# Altium PCB GRHV_Double_30v.PcbDoc
Units mil, origin at the board's own origin, x right, y up, seen from the top; angles counter-clockwise.
Board outline 6000 x 4000 mil, 2 copper layers (Top Layer, Bottom Layer); 83 components, 43 nets, 208 pads, 0 vias.
Unrouted connection lines stored in the file: 119.
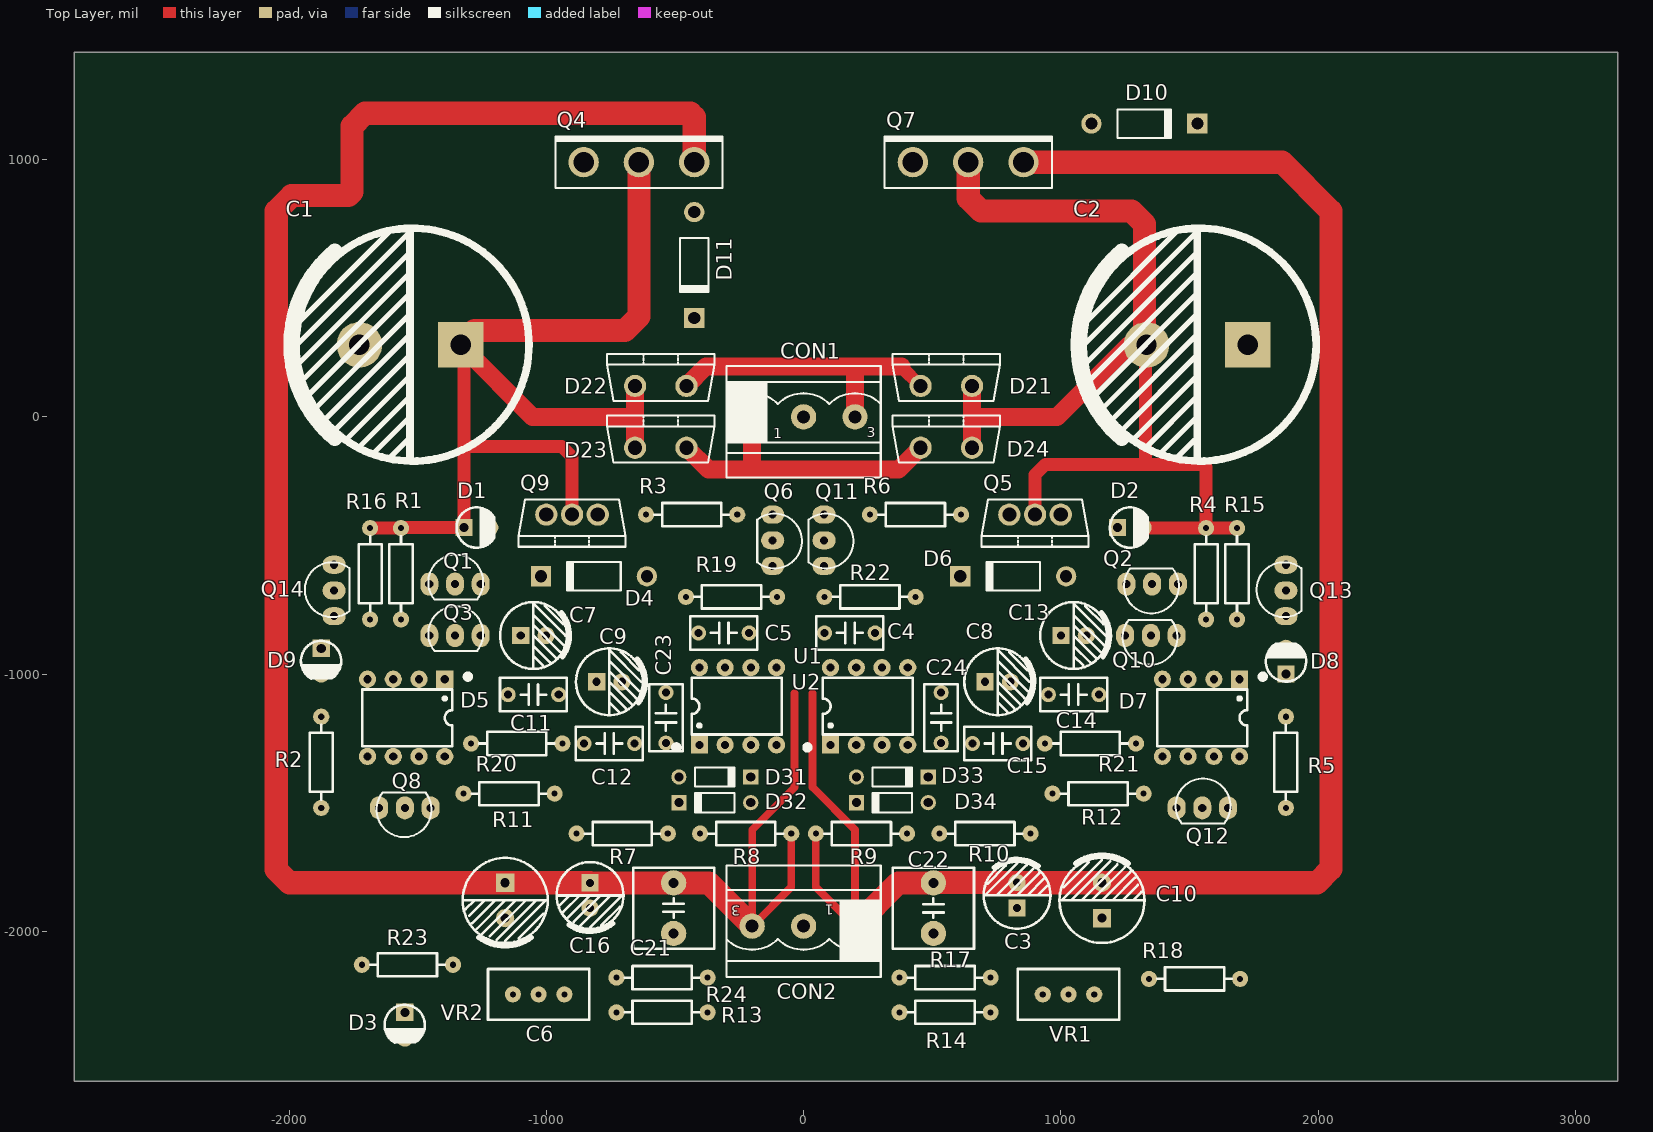
[diagram p0: Top Layer view]
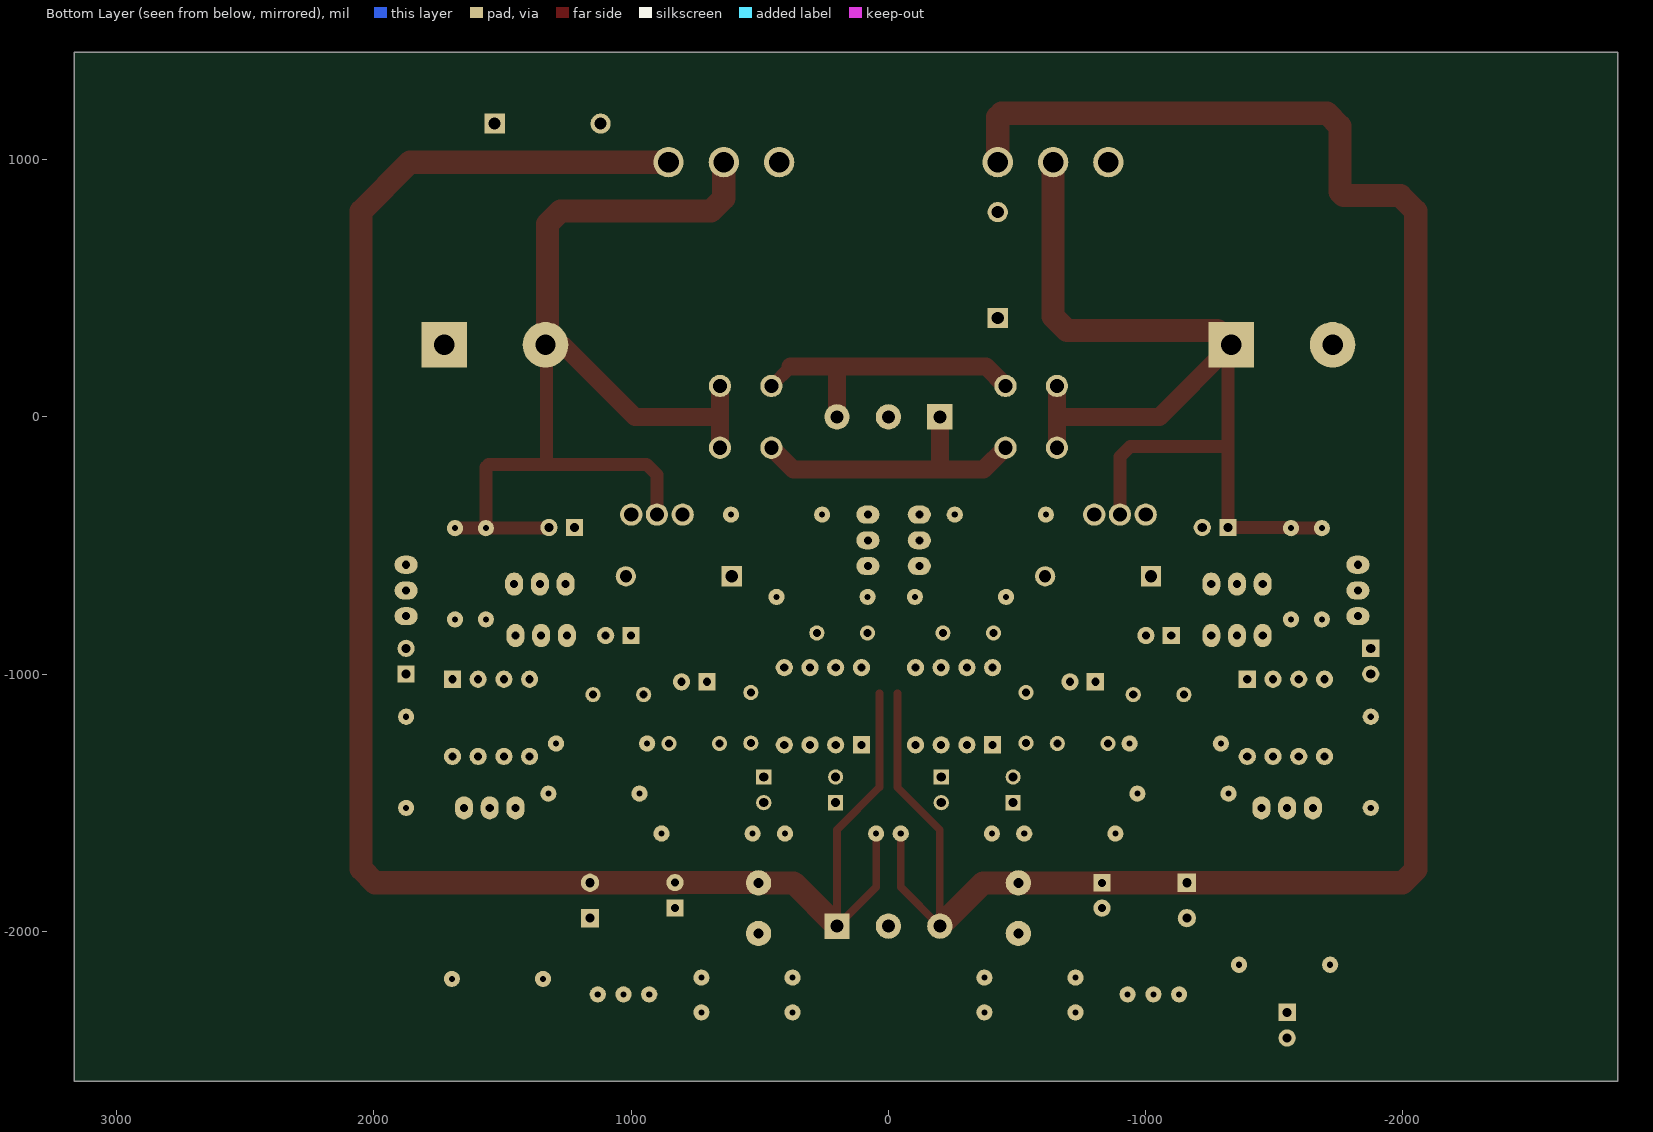
[diagram p1: Bottom Layer view, seen from below]

## Layer stack, top to bottom
Top Solder: solder mask 0.4, Solder Resist, Dk 3.5
Top Layer: signal copper 1.4
Dielectric 1: dielectric 12.6, FR-4, Dk 4.8
Bottom Layer: signal copper 1.4
Bottom Solder: solder mask 0.4, Solder Resist, Dk 3.5

## Board outline
-2835,-2582.83 3165,-2582.83 3165,1417.17 -2835,1417.17

## Design rules (kind name [scope] priority, off if disabled: settings)
Clearance [All] p1: gap=10 ignorepadtopadclearanceinfootprint=FALSE except(0: Arc-Hole Track-Hole SMDPad-Hole THPad-Hole Via-Hole Fill-Hole Poly-Hole Region-Hole Text-Hole)
PolygonConnect [All] p1: connectstyle=Relief reliefconductorwidth=10 reliefentries=4 polygonreliefangle="90 Angle" airgapwidth=10
RoomDefinition GRHV_double_30v [InComponentClass('GRHV_double_30v')] p1: confinementstyle=ConfineIn formatcopy=TRUE lockcomponents=FALSE outline 3180,-2580 23330,-2580 23330,-1530 3180,-1530
RoutingVias [All] p1: holewidth=28 width=50 viastyle="Through Hole" minholewidth=28 minwidth=50 maxholewidth=28 maxwidth=50
SolderMaskExpansion [All] p1: expansion=4
Width [All] p1: maxlimit=100 minlimit=10 preferedwidth=30
30 further rules are at their usual default settings.

## Components (designator, comment, footprint, x,y, rotation, side; value= is the part's Value field where it differs from the comment)
C1 "4700UF/16V" "CAP 10*22*40" -1530,280 r180 top
C2 "4700UF/16V" "CAP 10*22*40" 1530,280 r180 top
C3 "10UF/25V" "CAP 2.5*6.3*7" 830,-1860 r90 top
C4 "47pF/275V" "CBB 6.3*6.3*5" 180,-840 r180 top
C5 "47pF/275V" "CBB 6.3*6.3*5" -310,-840 r180 top
C6 "220UF/35V" "CAP 3.5*8*11.5" -1160,-1880 r270 top
C7 "47UF/25V" "CAP 2.5*6.3*11.2" -1050,-850 r0 top
C8 "47UF/25V" "CAP 2.5*6.3*11.2" 755,-1030 r0 top
C9 "47UF/25V" "CAP 2.5*6.3*11.2" -755,-1030 r0 top
C10 "220UF/35V" "CAP 3.5*8*11.5" 1160,-1880 r90 top
C11 "0.1uF/275V" "CBB 6.3*6.3*5" -1050,-1080 r0 top
C12 "0.1uF/275V" "CBB 6.3*6.3*5" -755,-1270 r0 top
C13 "47UF/25V" "CAP 2.5*6.3*11.2" 1050,-850 r0 top
C14 "0.1uF/275V" "CBB 6.3*6.3*5" 1050,-1080 r0 top
C15 "0.1uF/275V" "CBB 6.3*6.3*5" 755,-1270 r180 top
C16 "10UF/25V" "CAP 2.5*6.3*7" -830,-1860.79 r270 top
C21 "4.7uf/63v" "CBB 7.2*7.2*13" -505,-1910 r270 top
C22 "4.7uf/63v" "CBB 7.2*7.2*13" 505,-1910 r90 top
C23 "0.01uF/275V" "CBB 6.3*6.3*5" -535,-1170 r90 top value=0.01uF
C24 "0.01uF/275V" "CBB 6.3*6.3*5" 535,-1170 r90 top value=0.01uF
CON1 "AC220-3" HX5.08-3L -200,0 r0 top
CON2 "EDG5.08-3P" HX5.08-3L 200,-1980 r180 top
D1 "ValueValueAux" "LED 3MM-R" -1270,-430 r0 top
D2 "ValueValueAux" "LED 3MM-R" 1270,-430 r0 top
D3 "ValueValueAux" "LED 3MM-R" -1550,-2365 r270 top
D4 "1N4739" DO-41 -815,-620 r180 top
D5 "LT1021-10-2P" DIP8-300_MH -1545,-1170 r270 top
D6 "1N4739" DO-41 815,-620 r180 top
D7 "LT1021-10-2P" DIP8-300_MH 1545,-1170 r270 top
D8 "ValueValueAux" "LED 3MM-R" 1875,-950 r90 top
D9 "ValueValueAux" "LED 3MM-R" -1875,-950 r270 top
D10 "1N4007" DO-41 1325,1140 r0 top
D11 "1N4007" DO-41 -425,590 r270 top
D21 "VS-HFA08TB60-M3" TO220AC 455,120 r0 top
D22 "VS-HFA08TB60-M3" TO220AC -655,120 r0 top
D23 "VS-HFA08TB60-M3" TO220AC -655,-120 r0 top
D24 "VS-HFA08TB60-M3" TO220AC 455,-120 r0 top
D31 "1N914" DO-35 -345,-1400 r0 top
D32 "1N914" DO-35 -345,-1500 r180 top
D33 "1N914" DO-35 345,-1400 r0 top
D34 "1N914" DO-35 345,-1500 r180 top
Q1 "KSP92/93" TO92A -1455,-650 r90 top
Q2 "KSP42/43" TO92A 1455,-650 r270 top
Q3 "KSP92/93" TO92A -1455,-850 r90 top
Q4 "MJW21194" TO247V -855,990 r0 top
Q5 "MJF15031" TO220V 1000,-380 r180 top
Q6 "KSP92/93" TO92A -120,-380 r0 top
Q7 "MJW21193" TO247V 425,990 r0 top
Q8 "DN2540" TO92A -1450,-1520 r270 top
Q9 "MJF15030" TO220V -800,-380 r180 top
Q10 "KSP42/43" TO92A 1450,-850 r270 top
Q11 "KSP42/43" TO92A 80,-380 r0 top
Q12 "DN2540" TO92A 1450,-1520 r90 top
Q13 "KSP92/93" TO92A 1875,-775 r180 top
Q14 "KSP42/43" TO92A -1825,-775 r180 top
R1 "150" "RS 1/4W" -1565,-610 r270 top
R2 "1K" "RS 1/4W" -1875,-1343 r270 top
R3 "10" "RS 1/4W" -435,-380 r0 top
R4 "150" "RS 1/4W" 1565,-610 r90 top
R5 "1K" "RS 1/4W" 1875,-1343 r90 top
R6 "10" "RS 1/4W" 435,-380 r0 top
R7 "1.5K" "RS 1/4W" -705,-1620 r180 top
R8 "1.5K" "RS 1/4W" -225,-1620 r180 top
R9 "1.5K" "RS 1/4W" 225,-1620 r180 top
R10 "1.5K" "RS 1/4W" 705,-1620 r180 top
R11 "1K" "RS 1/4W" -1145,-1465 r0 top
R12 "1K" "RS 1/4W" 1145,-1465 r180 top
R13 "2K" "RS 1/4W" -550,-2315 r0 top
R14 "2K" "RS 1/4W" 550,-2315 r180 top
R15 "10K" "RS 1/4W" 1685,-610 r90 top
R16 "10K" "RS 1/4W" -1685,-610 r270 top
R17 "1M" "RS 1/4W" 550,-2180 r180 top
R18 "1M" "RS 1/4W" 1520,-2185 r180 top
R19 "10" "RS 1/4W" -280,-700 r180 top
R20 "500" "RS 1/4W" -1115,-1270 r180 top
R21 "500" "RS 1/4W" 1115,-1270 r0 top
R22 "10" "RS 1/4W" 258,-700 r0 top
R23 "1M" "RS 1/4W" -1540,-2130 r180 top
R24 "1M" "RS 1/4W" -550,-2180 r180 top
U1 "OPA134PA" DIP8-300_MH -255,-1125 r90 top
U2 "OPA134PA" DIP8-300_MH 255,-1125 r90 top
VR1 "VR-W" "RS 1/2W-VR" 1030,-2245 r180 top value=100K
VR2 "VR-W" "RS 1/2W-VR" -1030,-2245 r180 top value=100K

## Footprints (in the part's own frame and the unit in brackets; to place one, negate y for a bottom-side part, rotate by r counter-clockwise, add the part's x,y. Pads: shape width x height; smd on the part's side, far side on the other; paste and mask are expansions set on the pad)
"CAP 2.5*6.3*7" [mm] "脚距2.5mm直径6.3mm高度7mm"
  rect 1.7x1.7 hole 0.8: 1(-1.25,0)
  round 1.7 hole 0.8: 2(1.25,0)
  silkscreen extent -3.3,-3.3 3.56,3.3, body extent -3.15,-3.15 3.16,3.15, height 7.03
"CAP 2.5*6.3*11.2" [mm] "脚距2.5mm直径6.3mm高度11.2mm"
  rect 1.7x1.7 hole 0.8: 1(-1.25,0)
  round 1.7 hole 0.8: 2(1.25,0)
  silkscreen extent -3.3,-3.3 3.56,3.3, body extent -3.15,-3.15 3.16,3.15, height 11.23
"CAP 3.5*8*11.5" [mm] "脚距3.5mm直径8mm高度11.5mm"
  rect 1.8x1.8 hole 0.9: 1(-1.75,0)
  round 1.8 hole 0.9: 2(1.75,0)
  silkscreen extent -4.2,-4.2 4.5,4.2, body extent -4,-4 4.01,4, height 11.53
"CAP 10*22*40" [mm] "脚距10mm直径22mm高度40mm"
  rect 4.5x4.5 hole 2: 1(-5,0)
  round 4.5 hole 2: 2(5,0)
  silkscreen extent -11.75,-11.51 11.74,11.49, body extent -11,-11 11.01,11, height 40.03
"CBB 6.3*6.3*5" [mm] "脚距5mm高6.3mm厚3mm"
  round 1.5 hole 0.8: 1(-2.5,0) 2(2.5,0)
  silkscreen extent -3.3,-1.65 3.3,1.65, body extent -3.15,-1.5 3.15,1.5, height 6.8
"CBB 7.2*7.2*13" [mm] "脚距5mm高13mm厚7.2mm"
  round 2.5 hole 1: 1(-2.5,0) 2(2.5,0)
  silkscreen extent -4,-4 4,4, body extent -4,-4 4,4, height 17.53
DIP8-300_MH [mm] "带底座 9.4*7.6*3.8(长宽高）"
  rect 1.7x1.7 hole 0.8: 1(-3.81,3.81)
  round 1.7 hole 0.8: 2(-3.81,1.27) 3(-3.81,-1.27) 4(-3.81,-3.81) 5(3.81,-3.81) 6(3.81,-1.27) 7(3.81,1.27) 8(3.81,3.81)
  silkscreen extent -4.32,-4.32 2.79,6.35, body extent -5,-5.19 5,5.19, height 7.7
DO-35 [mm] "Diode, Axial; Body 3.8 x 1.9 mm (LxDia. max), Lead Dia. 0.53 mm (max)"
  round 1.5 hole 0.9: 1(-3.55,0)
  rect 1.5x1.5 hole 0.9: 2(3.55,0)
  silkscreen extent -1.95,-0.95 2.05,0.95
DO-41 [mm] "Diode, Axial; Body 5.2 x 2.7 mm (LxDia. max), Lead Dia. 0.86 mm (max)"
  round 2 hole 1.2: 1(-5.23,0)
  rect 2x2 hole 1.2: 2(5.23,0)
  silkscreen extent -2.65,-1.4 2.75,1.4
HX5.08-3L [mm]
  rect 2.5x2.5 hole 1.3: 1(0,0)
  round 2.5 hole 1.3: 2(5.08,0) 3(10.16,0)
  silkscreen extent -2.54,-6 12.7,5, body extent -2.5,-5.5 12.5,2.5, height 11
"LED 3MM-R" [mm] "红色3mm直插LED"
  rect 1.7x1.7 hole 0.9: 1(-1.27,0)
  round 1.7 hole 0.9: 2(1.27,0)
  silkscreen extent -2.01,-2 1.72,1.98, body extent -1.95,-1.95 1.64,1.95, height 5.55
"RS 1/2W-VR" [mm] "直插3脚顶调可调电阻，脚距2.54mm，长10mm*宽5mm*高10mm"
  round 1.6 hole 0.6: 1(-2.54,0) 2(2.54,0) 3(0,0)
  silkscreen extent -5,-2.5 5,2.5
"RS 1/4W" [mm] "直插色环电阻，脚距9mm，直径2.3mm"
  round 1.6 hole 0.6: 1(-4.5,0) 2(4.5,0)
  silkscreen extent -3.68,-1.14 3.68,1.14, body extent -4.72,-1.16 4.73,1.16, height 2.32
TO92A [mil]
  oval 90x70 hole 31.5: 1(0,0) 2(0,-100) 3(0,-200)
  silkscreen extent -60,-209 114,4
TO220AC [mm]
  round 2.2 hole 1.397: 1(0,0) 2(5.08,0)
  silkscreen extent -2.75,-1.48 7.83,3.17
TO220V [mm]
  round 2.2 hole 1.397: 1(0,0) 2(2.54,0) 3(5.08,0)
  silkscreen extent -2.75,-1.48 7.83,3.18
TO247V [mm]
  round 3 hole 2.032: 1(0,0) 2(5.461,0) 3(10.922,0)
  silkscreen extent -2.79,-2.54 13.72,2.54

## Part data
C1 C2 C3 C6 C7 C8 C9 C10 C13 C16: library part C-CAP, "直插电解电容", BOM名称=直插电解电容, 学习资源=www.ooocke.com, 版权归属=源创客
C4 C5 C11 C12 C14 C15 C23 C24: library part C-CBB, "CBB电容", BOM名称=CBB电容, 学习资源=www.ooocke.com, 版权归属=源创客
C21 C22: library part C-MKS, "MKS薄膜电容"
D1 D2 D3 D8 D9: library part LED, "直插式LED"
D4 D6: "9.1V/1W稳压管"
D5 D7: "10V Precision Reference 2 Pin Config"
D10 D11: "整流二极管", BOM名称=整流二极管, 学习资源=www.ooocke.com, 版权归属=源创客
D21 D22 D23 D24: "Ultrafast Soft Recovery Diado 8A 600V"
D31 D32 D33 D34: "高速开关管 1V/0.25W"
Q1 Q3 Q6 Q13: "High Voltage PNP Transistor"
Q2 Q10 Q11 Q14: "High Voltage NPN Transistor"
Q4 Q9: "Power NPN Transistor"
Q5 Q7: "Power PNP Transistor"
Q8 Q12: "N沟道耗尽型DMOS场效应管 400V/150ma"
R1 R2 R3 R4 R5 R6 R7 R8 R9 R10 R11 R12 R13 R14 R15 R16 R17 R18 R19 R20 R21 R22 R23 R24: library part R-CRR, "直插色环电阻", BOM名称=色环电阻, 学习资源=www.ooocke.com, 版权归属=源创客
VR1 VR2: "直插可调电阻-顶调"

## Nets (pads, with @x,y where several pads share a name; then routed paths per layer and width w, separated by ;. In a path a pad name is that pad's centre, name@x,y a point inside that pad or via, vN(x,y) a via of type N, cw(c..) or ccw(c..) an arc to the next point about the centre after c; other vN are vias at no path point)
GND: C1.2 C2.1 C6.2 C8.1 C9.2 C10.1 C12.2 C15.2 C21.2 C22.1 C23.1 C24.1 CON1.2 CON2.2 D5.4 D7.6 D8.1 D9.2 Q6.3 Q11.3 R2.2 R5.1 R7.2 R10.1 R18.1 R23.2 U1.4 U2.7
NetC1_1: C1.1 D1.1 D11.2 D22.1 D23.1 Q4.2 Q9.2 R1.1 R16.1 | length 4097.4
  Top Layer w50: R16.1 R1.1 -1562.17,-430 D1.1 -1320,-115 ; C1.1 -1320,266.85 -1320,-115 ; Q9.2 -900,-155 -940,-115 -1320,-115
  Top Layer w70: C1.1@-1320,266.85 -1053.15,0 -655,0 ; D23.1 -655,0 ; D22.1 -655,0
  Top Layer w90: C1.1 -1278.15,335 -695,335 -640,390 Q4.2
NetC2_2: C2.2 D2.2 D10.1 D21.2 D24.2 Q5.2 Q7.2 R4.2 R15.2 | length 4279.2
  Top Layer w50: Q5.2 900,-225 940,-185 1330,-185 ; D2.2 1322.83,-432.83 R4.2 ; C2.2@1325,288.15 1330,283.15 1330,280 1330,-185 ; R15.2 R4.2 ; 1330,-185 1555,-185 1565,-195 R4.2
  Top Layer w70: D24.2 655,0 ; D21.2 655,0 ; C2.2@1330,280 1265,280 985,0 655,0
  Top Layer w90: Q7.2 640,850 690,800 1275,800 1325,750 C2.2@1325,288.15
NetC3_1: C3.1 C4.2 D33.1 D34.2 R9.1 R10.2 U2.2 VR1.3
NetC3_2: C3.2 C10.2 C22.2 C24.2 CON2.1 D10.2 Q7.3 Q12.2 R9.2 R12.2 R14.2 R17.2 U2.4 | length 7169.8
  Top Layer w30: 35,-1075 35,-1440 200,-1605 CON2.1 47.83,-1827.83 R9.2
  Top Layer w90: CON2.1 368.43,-1811.57 C22.2 505.79,-1810.79 C3.2 830.31,-1811.1 C10.2 1996.1,-1811.1 2050,-1757.2 2050,800 1860,990 Q7.3
NetC4_1: C4.1 R22.2 U2.6
NetC5_1: C5.1 R19.2 U1.6
NetC5_2: C5.2 C16.2 D31.1 D32.2 R7.1 R8.2 U1.2 VR2.3
NetC6_1: C6.1 C16.1 C21.1 C23.2 CON2.3 D11.1 Q4.3 Q8.3 R8.1 R13.2 R24.1 U1.7 | length 8010.5
  Top Layer w30: R8.1 -47.83,-1827.83 CON2.3 -200,-1605 -35,-1440 -35,-1075
  Top Layer w90: Q4.3 -425,1165 -440,1180 -1705,1180 -1755,1130 -1755,875 -1770,860 -1990,860 -2050,800 -2050,-1760 -1998.9,-1811.1 C6.1 -830.47,-1811.1 C16.1 C21.1 -368.43,-1811.57 CON2.3
NetC7_1: C7.1 C11.1 D4.2 Q3.3 Q9.1
NetC7_2: C7.2 C11.2 D4.1 R3.1
NetC8_2: C8.2 C15.1 D33.2 D34.1 R21.1 U2.3
NetC9_1: C9.1 C12.1 D31.2 D32.1 R20.1 U1.3
NetC13_1: C13.1 C14.1 D6.2 R6.2
NetC13_2: C13.2 C14.2 D6.1 Q5.1 Q10.3
NetCON1_1: CON1.1 D23.2 D24.1 | length 1185.4
  Top Layer w70: D23.2 -370,-205 -200,-205 ; CON1.1 -200,-205 ; D24.1 370,-205 -200,-205
NetCON1_3: CON1.3 D21.1 D22.2 | length 1169.2
  Top Layer w50: 195,195 200,190 ; 380,195 D21.1
  Top Layer w70: D22.2 -380,195 195,195 380,195 ; CON1.3 200,190
NetD1_2: D1.2 Q1.1
NetD2_1: D2.1 Q2.1
NetD3_1: D3.1 R13.1
NetD3_2: D3.2 R14.1
NetD5_6: D5.6 Q8.2 R11.2 R20.2
NetD7_4: D7.4 Q12.3 R21.2
NetD8_2: D8.2 Q13.2 R15.1
NetD9_1: D9.1 Q14.2 R16.2
NetQ1_2: Q1.2 Q1.3 Q3.2 Q14.3
NetQ2_2: Q2.2 Q2.3 Q10.2 Q13.3
NetQ3_1: Q3.1 R1.2
NetQ4_1: Q4.1 Q9.3
NetQ5_3: Q5.3 Q7.1
NetQ6_1: Q6.1 R3.2
NetQ6_2: Q6.2 R19.1
NetQ8_1: Q8.1 R11.1
NetQ10_1: Q10.1 R4.1
NetQ11_1: Q11.1 R6.1
NetQ11_2: Q11.2 R22.1
NetQ12_1: Q12.1 R12.1
NetQ13_1: Q13.1 R5.2
NetQ14_1: Q14.1 R2.1
NetR17_1: R17.1 VR1.2
NetR18_2: R18.2 VR1.1
NetR23_1: R23.1 VR2.2
NetR24_2: R24.2 VR2.1
pads on no net: D5.1 D5.2 D5.3 D5.5 D5.7 D5.8 D7.1 D7.2 D7.3 D7.5 D7.7 D7.8 U1.1 U1.5 U1.8 U2.1 U2.5 U2.8

## Text inside footprints (layer, text, board x,y; h text height)
CON1: Top Overlay "3" at 246,-80 h40; Top Overlay "1" at -117,-83 h40
CON2: Top Overlay "3" at -246,-1900 h40 r180; Top Overlay "1" at 117,-1897 h40 r180